# EAGLE board Circuito_impresso (EAGLE 9.6.2)
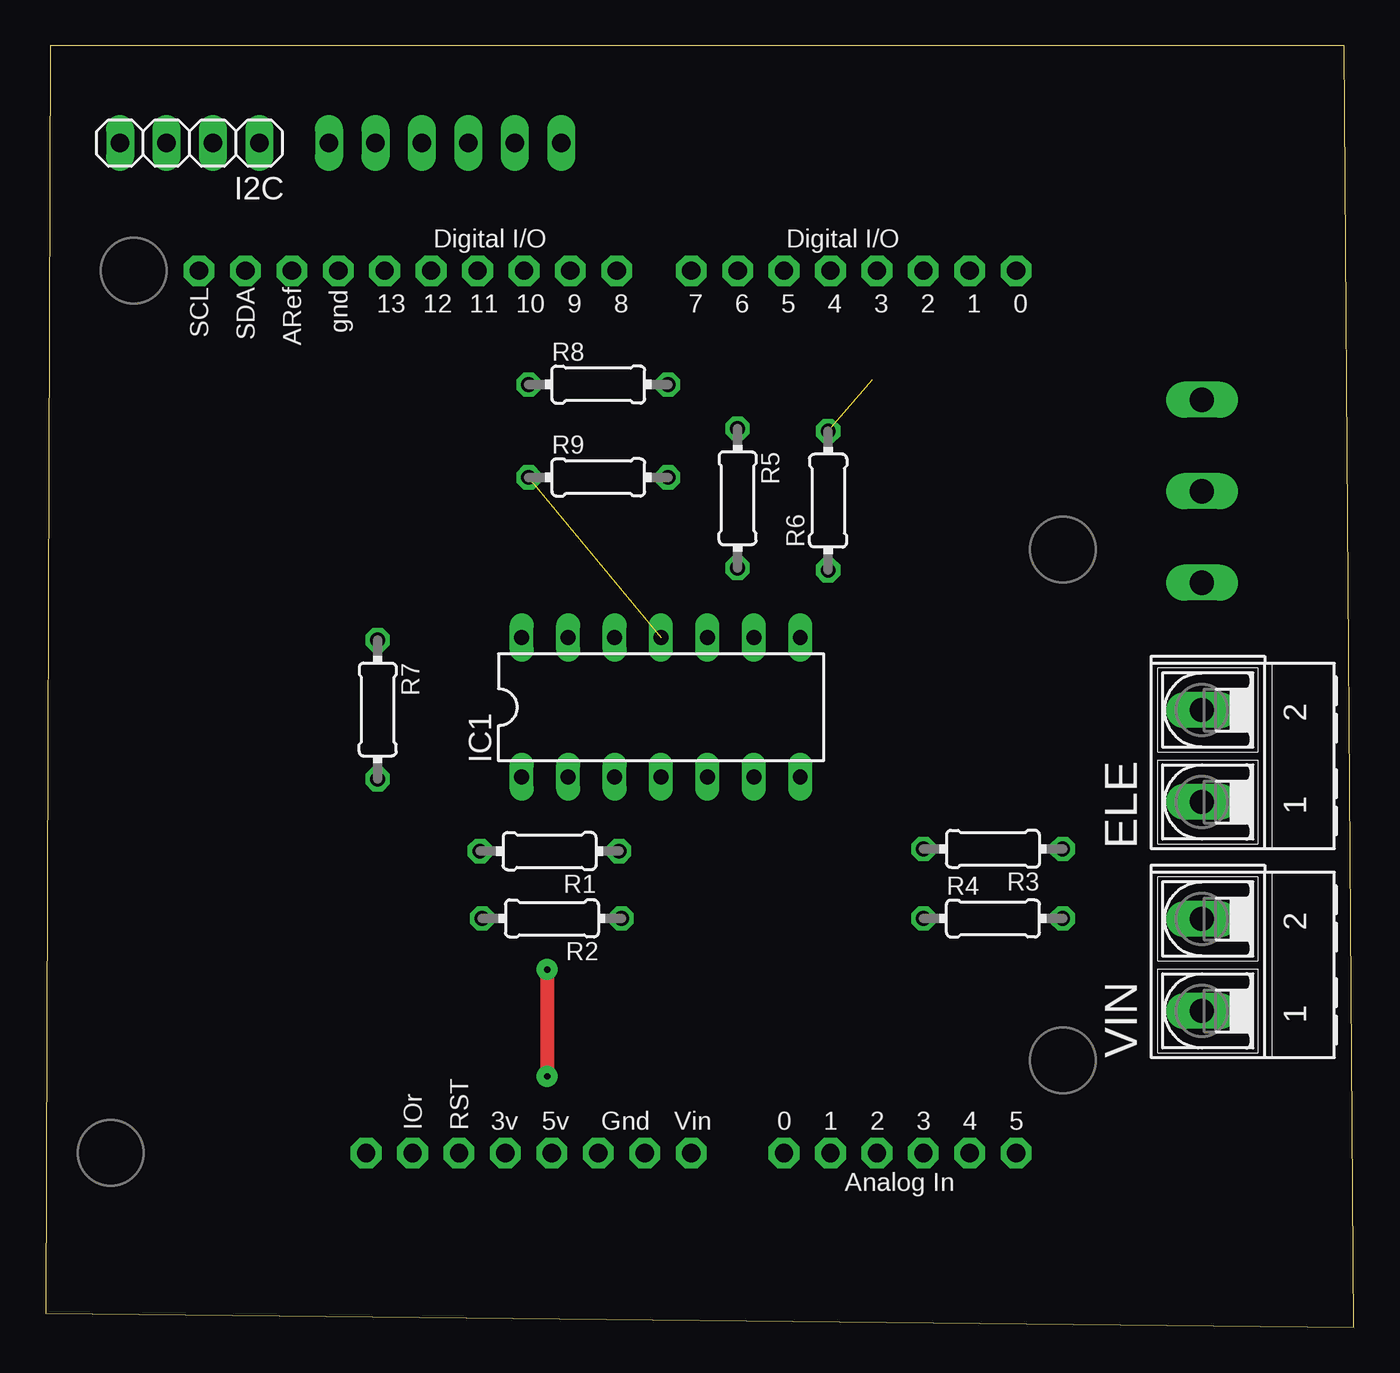
[diagram p0: board, top side]
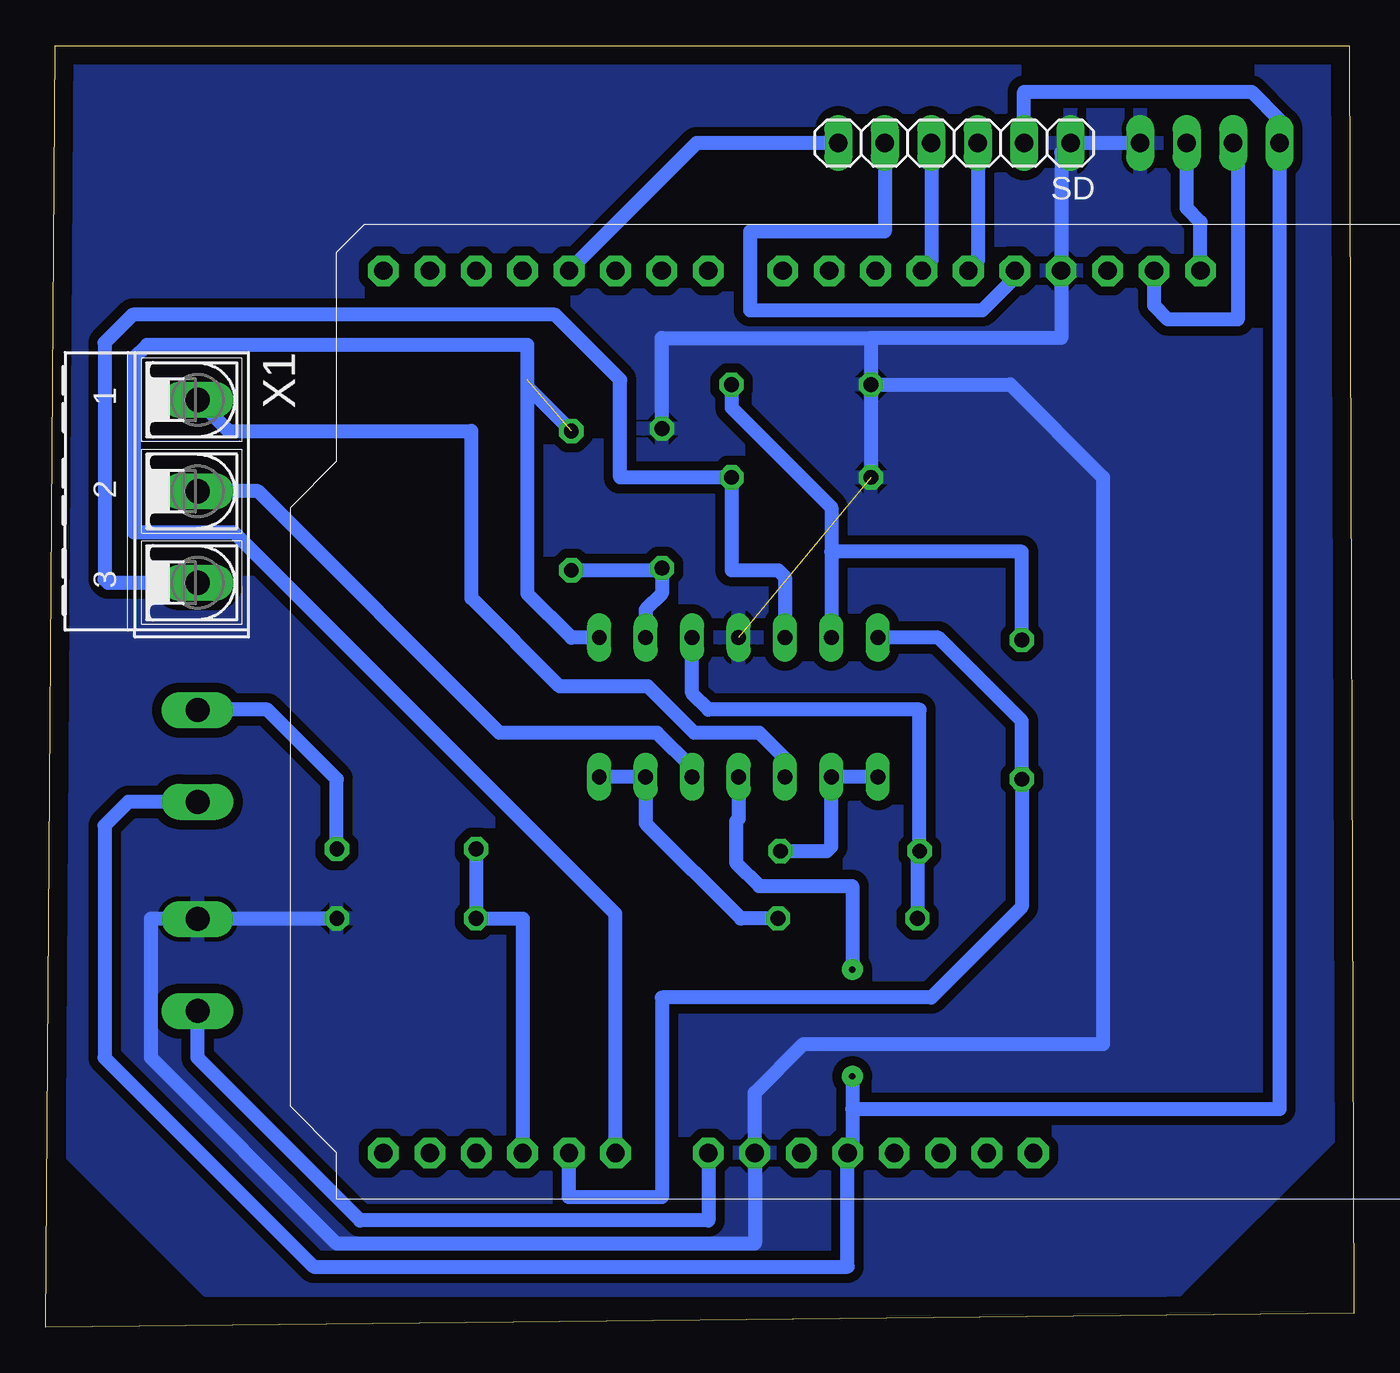
[diagram p1: board, bottom side, seen from below]

Size 71.55 x 70.09 mm. Coordinates in mm from the lower left corner, seen from the top.
Outline: 0,0.76 71.55,0 71.04,70.09 0.25,70.09 0,0.76
Copper layers (1*16): Top 0.035mm / dielectric 1.5mm / Bottom 0.035mm
Design rules "default *": minimum track width 10mil, minimum drill 0.35mm, track to track 20mil, track to pad 20mil, pad to pad 20mil, via to via 20mil, smd to smd 20mil, copper to edge 40mil, drill to drill 6mil, minimum pad ring 10mil, minimum via ring 8mil, stop-mask expansion 4mil, vias tented up to drill 0mil, thermal gap 10mil

## Footprints (pad centres in the part's own frame; a part is rotated, then mirrored left to right if it is on the bottom)
AK500/2-H = drill 1.321 long: 1 -2.515,0; 2 2.515,0
1X04 = drill 1.016 long: 1 -3.81,0; 2 -1.27,0; 3 1.27,0; 4 3.81,0
DIL14 = drill 0.813 long: 1 -7.62,-3.81; 2 -5.08,-3.81; 3 -2.54,-3.81; 4 0,-3.81; 5 2.54,-3.81; 6 5.08,-3.81; 7 7.62,-3.81; 8 7.62,3.81; 9 5.08,3.81; 10 2.54,3.81; 11 0,3.81; 12 -2.54,3.81; 13 -5.08,3.81; 14 -7.62,3.81
0204/7 = drill 0.813 octagon: 1 -3.81,0; 2 3.81,0
1X06 = drill 1.016 long: 1 -6.35,0; 2 -3.81,0; 3 -1.27,0; 4 1.27,0; 5 3.81,0; 6 6.35,0
ARDUINOR3-BPLACE = drill 1 pad 1.676 octagon: 3V 35.56,2.54; 5V 38.1,2.54; A0 50.8,2.54; A1 53.34,2.54; A2 55.88,2.54; A3 58.42,2.54; A4 60.96,2.54; A5 63.5,2.54; AREF 23.876,50.8; D0 63.5,50.8; D1 60.96,50.8; D2 58.42,50.8; D3 55.88,50.8; D4 53.34,50.8; D5 50.8,50.8; D6 48.26,50.8; D7 45.72,50.8; D8 41.656,50.8; D9 39.116,50.8; D10 36.576,50.8; D11 34.036,50.8; D12 31.496,50.8; D13 28.956,50.8; GND 26.416,50.8; GND1 43.18,2.54; GND2 40.64,2.54; IOREF 30.48,2.54; RESERVED 27.94,2.54; RESET 33.02,2.54; SCL 18.796,50.8; SDA 21.336,50.8; VIN 45.72,2.54
AK500/3-H = drill 1.321 long: 1 -5.004,0; 2 0,0; 3 5.004,0

## Placement (x,y rotation side)
ELE  [AK500/2-H]  63.25,31.24 90 top
I2C  [1X04]  7.87,64.77 180 top
IC1  LM324N  [DIL14]  33.66,33.91 0 top
R1  10K  [0204/7]  27.56,26.04 180 top
R2  10K  [0204/7]  27.69,22.35 180 top
R3  1K  [0204/7]  51.82,26.16 180 top
R4  10K  [0204/7]  51.82,22.35 0 top
R5  10K  [0204/7]  37.85,45.34 270 top
R6  10K  [0204/7]  42.8,45.21 90 top
R7  2K  [0204/7]  18.16,33.78 270 top
R8  10K  [0204/7]  30.23,51.56 0 top
R9  1  [0204/7]  30.23,46.48 0 top
SD  [1X06]  21.84,64.77 180 bottom
U1  ARDUINOR3-BPLACE  [ARDUINOR3-BPLACE]  -10.41,6.98 0 top
VIN  [AK500/2-H]  63.25,19.81 90 top
X1  [AK500/3-H]  63.25,45.72 270 bottom

## Library data of the parts
ELE VIN X1 = con-ptr500; OC_FARNELL: unknown; OC_NEWARK: unknown
I2C SD = pinhead
IC1 = linear
R1-R9 = resistor
U1 = adafruit

## Nets
3V: U1.3V
A1: IC1.8 R6.2 U1.A0
GND: I2C.1 IC1.11 R4.2 R5.1 R8.1 R9.1 SD.1 U1.GND U1.GND1 VIN.2
GND2: U1.GND2
N$16: I2C.3 U1.SDA
N$17: IC1.1 IC1.2 R1.1
N$18: IC1.3 X1.1
N$19: ELE.2 R3.1
N$21: IC1.6 IC1.7 R2.1
N$22: I2C.2 U1.SCL
N$23: IC1.5 X1.2
N$24: IC1.9 R5.2 R6.1
N$26: IC1.10 R1.2 R2.2
N$27: U1.VIN VIN.1
N$29: SD.5 U1.D13
N$30: SD.3 U1.D12
N$31: SD.4 U1.D11
N$32: SD.6 U1.D4
N$33: IC1.13 R7.1 R8.2
N$34: ELE.1 I2C.4 IC1.4 SD.2 U1.5V
N$35: IC1.12 R9.2 X1.3
N$36: IC1.14 R7.2 U1.A1
N$37: R3.2 R4.1 U1.A2

## Tracks (layer width: path | path; a pad name or v marks a point on that pad's centre or on a via)
A1  (1 unrouted)
  Bottom 0.762: U1.A0 40.39,22.6 61.27,43.48 66.73,43.48 66.73,53.01 66.01,53.72 45.21,53.72 45.21,51.44 R6.2 | 45.21,51.82 45.21,40.13 42.8,37.72 IC1.8
GND  (1 unrouted)
  Bottom 0.152: 63.27,22.35 VIN.2 | R4.2 55.65,22.33
  Bottom 0.762: 63.27,22.35 65.79,22.35 65.79,14.73 55.63,4.57 32.77,4.57 U1.GND1 32.77,12.83 30.1,15.49 13.72,15.49 13.72,46.48 18.8,51.56 R8.1 | 55.65,22.33 VIN.2 | R8.1 R9.1 | R5.1 37.85,54.1 26.42,54.1 | 26.42,54.1 R8.1 | 26.42,54.1 16,54.1 U1.GND 16,64.26 SD.1 I2C.1 | IC1.11 33.66,36.96 33.53,36.83
  pour Bottom: 62.48,2.03 9.65,2.03 1.27,10.41 1.27,69.09 69.85,69.09 70.1,68.83 70.1,9.4 62.74,2.03
N$16
  Bottom 0.762: U1.SDA 10.92,55.88 10.16,55.12 6.35,55.12 6.35,64.52 I2C.3
N$17
  Bottom 0.762: R1.1 28.83,26.04 28.58,26.29 IC1.2 IC1.1
N$18
  Bottom 0.762: IC1.3 31.12,31.12 32.51,32.51 36.07,32.51 38.61,35.05 43.43,35.05 48.26,39.88 48.26,49.02 61.54,49.02 X1.1
N$19
  Bottom 0.152: 63.22,33.78 ELE.2
  Bottom 0.762: R3.1 55.63,29.97 59.44,33.78 63.22,33.78
N$21
  Bottom 0.762: IC1.7 IC1.6 38.74,27.56 33.53,22.35 R2.1
N$22
  Bottom 0.762: U1.SCL 8.38,60.45 9.14,61.21 I2C.2
N$23
  Bottom 0.762: IC1.5 36.2,30.61 38.1,32.51 46.74,32.51 59.94,45.72 X1.2
N$24
  Bottom 0.152: R6.1 37.97,41.4 R5.2 37.85,41.4
  Bottom 0.762: IC1.9 38.74,39.24 37.85,40.13 37.85,41.4 R6.1
N$26
  Bottom 0.762: R2.2 23.88,25.91 R1.2 23.75,33.78 35.31,33.78 36.2,34.67 IC1.10
N$27
  Bottom 0.762: U1.VIN 35.31,5.84 54.36,5.84 63.25,14.73 VIN.1
N$29
  Bottom 0.762: SD.5 25.65,59.94 33.02,59.94 33.02,55.63 20.32,55.63 18.54,57.4 U1.D13
N$30
  Bottom 0.762: SD.3 20.57,58.29 U1.D12
N$31
  Bottom 0.762: SD.4 23.11,58.29 U1.D11
N$32
  Bottom 0.762: SD.6 35.94,64.77 U1.D4
N$33
  Bottom 0.762: R8.2 34.04,50.29 28.58,44.83 28.58,42.42 | 28.58,42.42 IC1.13 | R7.1 18.16,42.42 28.58,42.42
N$34  (via drill 0.35 pad 1.15)
  Top 0.762: v27.43,19.56 v27.43,13.72
  Bottom 0.762: ELE.1 67.03,28.73 68.33,27.43 68.33,14.73 56.9,3.3 27.69,3.3 U1.5V 27.43,9.78 27.43,11.94 | 27.43,11.94 4.06,11.94 I2C.4 4.06,66.04 5.59,67.56 18.03,67.56 SD.2 | IC1.4 33.66,27.81 33.78,27.69 33.78,25.4 32.51,24.13 27.43,24.13 v27.43,19.56 | v27.43,13.72 27.43,11.94
N$35
  Bottom 0.762: IC1.12 31.12,41.02 31.5,41.4 34.04,41.4 R9.2 40.13,46.48 40.13,51.82 43.69,55.37 66.8,55.37 68.33,53.85 68.33,40.89 68.15,40.72 X1.3
N$36
  Bottom 0.762: IC1.14 22.73,37.72 18.16,33.15 R7.2 18.16,22.99 23.11,18.03 37.85,18.03 37.85,7.11 42.93,7.11 U1.A1
N$37
  Bottom 0.762: R3.2 R4.1 45.47,22.35 U1.A2